# Altium PCB JacdacEc30Template10x60 102.PcbDoc
Units mm, origin at the board's own origin, x right, y up, seen from the top; angles counter-clockwise.
Board outline 18 x 55 mm, 2 copper layers (Top Layer, Bottom Layer), stack 1.525 mm thick; 8 components, 3 nets, 32 pads, 2 vias.
Unrouted connection lines stored in the file: 7.
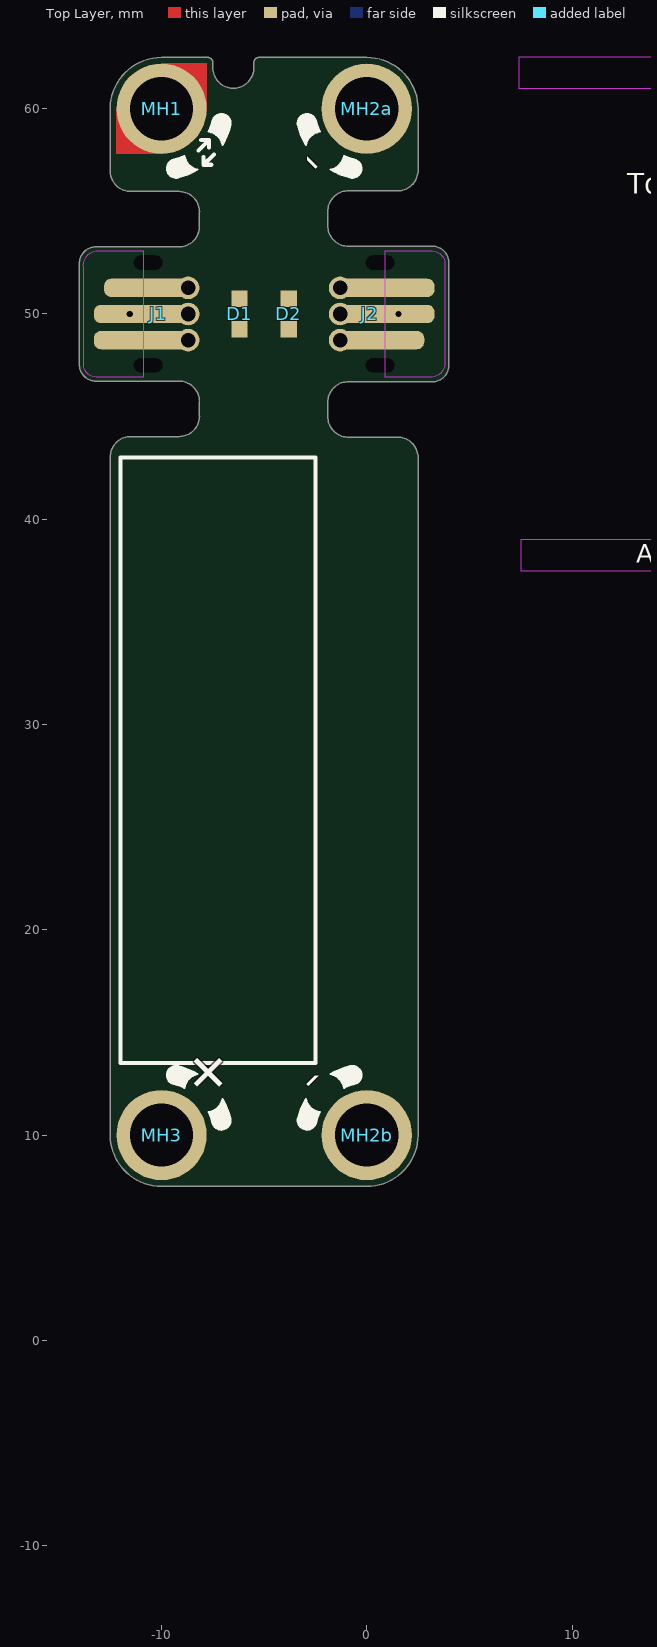
[diagram p0: Top Layer view]
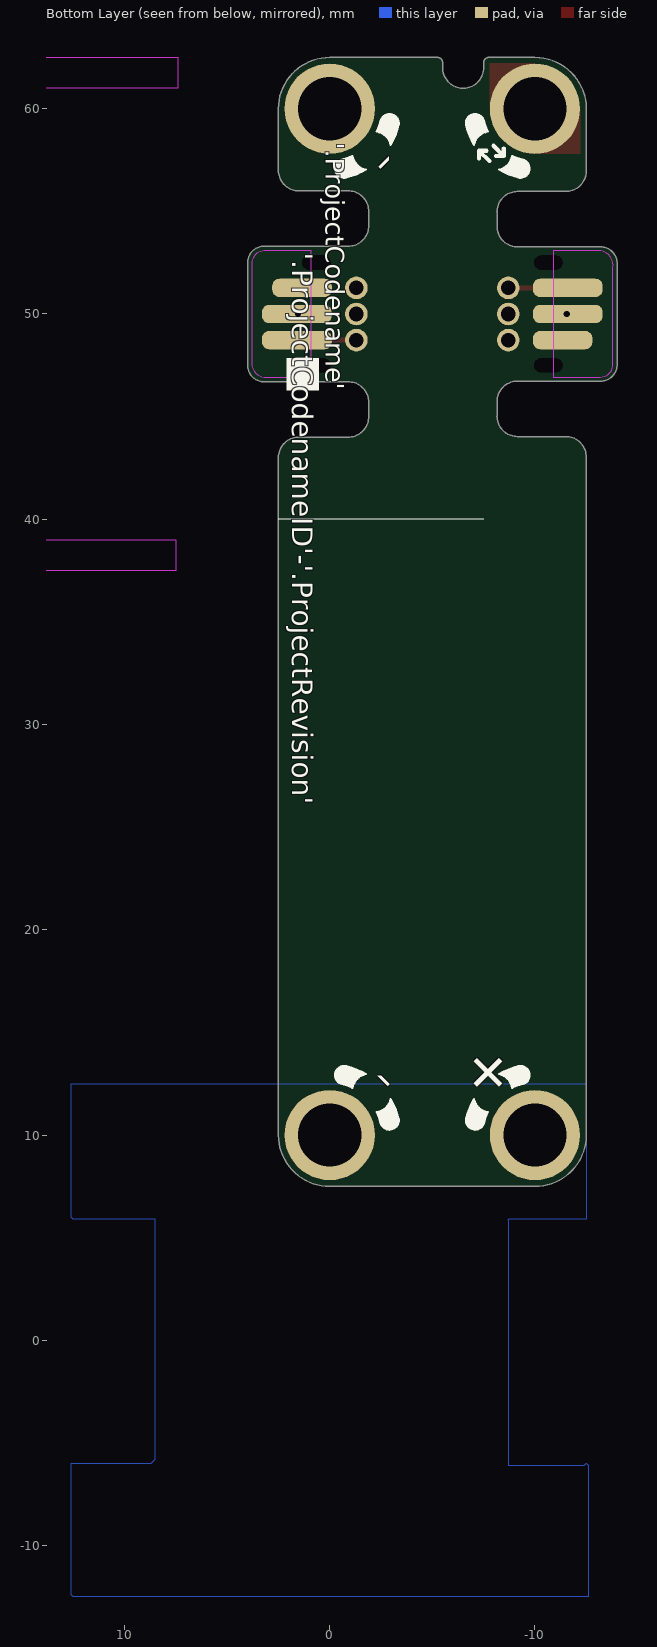
[diagram p1: Bottom Layer view, seen from below]

## Layer stack, top to bottom
Top Solder: solder mask 0.0102, Solder Resist, Dk 3.5
Top Layer: signal copper 0.0356
Dielectric 1: core 1.454, FR-4, Dk 4.2
Bottom Layer: signal copper 0.0356
Bottom Solder: solder mask 0.0102, Solder Resist, Dk 3.5

## Board outline
-12.5,10 -12.5,43.03 cw(c-11.5,43.03) -11.5,44.03 -9.148,44.03 ccw(c-9.148,45.03) -8.148,45.03 -8.15,45.03 -8.15,45.73 ccw(c-9.15,45.73) -9.15,46.73 -13.2,46.73 cw(c-13.2,47.53) -14,47.53 -14,52.47 cw(c-13.2,52.47) -13.2,53.27 -13.198,53.27 -9.148,53.27 -9.15,53.27 ccw(c-9.15,54.27) -8.15,54.27 -8.15,54.24 -8.15,54.97 -8.148,54.97 ccw(c-9.148,54.97) -9.148,55.97 -11.5,55.97 cw(c-11.5,56.97) -12.5,56.97 -12.5,60 cw(c-10,60) -10,62.5 -7.75,62.5 cw(c-7.75,62.25) -7.5,62.25 -7.5,62 ccw(c-6.5,62) -5.5,62 -5.5,62.25 cw(c-5.25,62.25) -5.25,62.5 0,62.5 cw(c0,60) 2.5,60 2.5,57 cw(c1.5,57) 1.5,56 -0.9,56 ccw(c-0.9,55) -1.9,55 -1.9,54.3 -1.902,54.3 ccw(c-0.902,54.3) -0.902,53.3 3.2,53.3 cw(c3.2,52.5) 4,52.5 4,47.5 cw(c3.2,47.5) 3.2,46.7 -0.9,46.7 ccw(c-0.9,45.7) -1.9,45.7 -1.9,45 ccw(c-0.9,45) -0.9,44 1.5,44 cw(c1.5,43) 2.5,43 2.5,10 cw(c0,10) 0,7.5 -10,7.5 cw(c-10,10)

## Design rules (kind name [scope] priority, off if disabled: settings)
AssemblyTestPointUsage [All] p1: valid=2
BoardOutlineClearance [not (HasFootprint('MOUSEBITE_CONNECTOR_3X2') or HasFootprint('MOUSEBITE_NOCONNECTOR_3'))] p1: gap=0.3 ignorepadtopadclearanceinfootprint=FALSE except(0: Arc-SplitContinuation Track-SplitContinuation SMDPad-SplitContinuation THPad-SplitContinuation Via-SplitContinuation Fill-SplitContinuation Poly-SplitContinuation Text-OutlineEdge Text-CavityEdge Text-CutoutEdge Text-SplitBarrior Text-SplitContinuation; 0.15: Region-OutlineEdge Region-CavityEdge Region-CutoutEdge Region-SplitBarrior Region-SplitContinuation)
Clearance [not (IsPad and HasFootprint('MOUSEBITE_CONNECTOR_3X2'))] p1: gap=0.15 ignorepadtopadclearanceinfootprint=FALSE except(0.254: Arc-Hole Track-Hole SMDPad-Hole THPad-Hole Via-Hole Fill-Hole Poly-Hole Region-Hole Text-Hole)
ComponentClearance [All] p1: gap=0.01 collisioncheckmode=3 verticalgap=0.2 showdistances=FALSE
DiffPairsRouting [All] p1: maxlimit=2 minlimit=0.15 mostfreqgap=0.15 toplayer_minwidth=0.15 toplayer_maxwidth=2 toplayer_prefwidth=0.15 bottomlayer_minwidth=0.15 bottomlayer_maxwidth=2 bottomlayer_prefwidth=0.15 substack1={CB9D278B-8BF5-444A-AAF4-837A2A9DF42D} toplayer_{cb9d278b-8bf5-444a-aaf4-837a2a9df42d}_minwidth=0.381 toplayer_{cb9d278b-8bf5-444a-aaf4-837a2a9df42d}_maxwidth=0.381 toplayer_{cb9d278b-8bf5-444a-aaf4-837a2a9df42d}_prefwidth=0.381 bottomlayer_{cb9d278b-8bf5-444a-aaf4-837a2a9df42d}_minwidth=0.381 bottomlayer_{cb9d278b-8bf5-444a-aaf4-837a2a9df42d}_maxwidth=0.381 bottomlayer_{cb9d278b-8bf5-444a-aaf4-837a2a9df42d}_prefwidth=0.381 substack2={826B8647-A721-4255-895A-19F9591B9CD1} toplayer_{826b8647-a721-4255-895a-19f9591b9cd1}_minwidth=0.381 toplayer_{826b8647-a721-4255-895a-19f9591b9cd1}_maxwidth=0.381 toplayer_{826b8647-a721-4255-895a-19f9591b9cd1}_prefwidth=0.381 bottomlayer_{826b8647-a721-4255-895a-19f9591b9cd1}_minwidth=0.381 bottomlayer_{826b8647-a721-4255-895a-19f9591b9cd1}_maxwidth=0.381 bottomlayer_{826b8647-a721-4255-895a-19f9591b9cd1}_prefwidth=0.381 substack3={E64FCAF4-1BC8-437D-B1E0-0E5F2DC0F59E} toplayer_{e64fcaf4-1bc8-437d-b1e0-0e5f2dc0f59e}_minwidth=0.381 toplayer_{e64fcaf4-1bc8-437d-b1e0-0e5f2dc0f59e}_maxwidth=0.381 toplayer_{e64fcaf4-1bc8-437d-b1e0-0e5f2dc0f59e}_prefwidth=0.381 bottomlayer_{e64fcaf4-1bc8-437d-b1e0-0e5f2dc0f59e}_minwidth=0.381 bottomlayer_{e64fcaf4-1bc8-437d-b1e0-0e5f2dc0f59e}_maxwidth=0.381 bottomlayer_{e64fcaf4-1bc8-437d-b1e0-0e5f2dc0f59e}_prefwidth=0.381 substack4={E61CE66C-507C-4E1E-8E83-C905434AFC1C} toplayer_{e61ce66c-507c-4e1e-8e83-c905434afc1c}_minwidth=0.381 toplayer_{e61ce66c-507c-4e1e-8e83-c905434afc1c}_maxwidth=0.381 toplayer_{e61ce66c-507c-4e1e-8e83-c905434afc1c}_prefwidth=0.381 bottomlayer_{e61ce66c-507c-4e1e-8e83-c905434afc1c}_minwidth=0.381 bottomlayer_{e61ce66c-507c-4e1e-8e83-c905434afc1c}_maxwidth=0.381 bottomlayer_{e61ce66c-507c-4e1e-8e83-c905434afc1c}_prefwidth=0.381 maxuncoupledlength=25
FabricationTestPointUsage [All] p1: valid=2 allowmultiple=FALSE
HoleSize [All] p1: absolutevalues=TRUE maxlimit=5 minlimit=0.3 maxpercent=80.000 minpercent=20.000
HoleToHoleClearance [IsPad and not (HasFootprint('MOUSEBITE_CONNECTOR_3X2') or HasFootprint('MOUSEBITE_NOCONNECTOR_3')) vs IsPad and not  (HasFootprint('MOUSEBITE_CONNECTOR_3X2') or HasFootprint('MOUSEBITE_NOCONNECTOR_3'))] p1: gap=0.5 allowstackedmicrovias=TRUE
MinimumAnnularRing [All] p1: minimumring=0.15
MinimumSolderMaskSliver [All] p1: minsoldermaskwidth=0.005
PlaneClearance [All] p1: clearance=0.3
PlaneConnect [All] p1: planeconnectstyle=Relief reliefexpansion=0.5 reliefentries=4 reliefconductorwidth=0.2 reliefairgap=0.3
PolygonConnect "PolygonConnect GND" [isVIA] p1: connectstyle=Relief reliefconductorwidth=0.2 reliefentries=4 polygonreliefangle="90 Angle" airgapwidth=0.2
PolygonConnect [All] p2: connectstyle=Relief reliefconductorwidth=0.2 reliefentries=4 polygonreliefangle="90 Angle" airgapwidth=0.2
RoutingVias [All] p1: holewidth=0.3 width=0.6 viastyle="Through Hole" minholewidth=0.3 minwidth=0.6 maxholewidth=0.3 maxwidth=0.8
SilkToSilkClearance [All] p1: silktosilkclearance=0.001
SilkToSolderMaskClearance [IsPad] p1: minsilkscreentomaskgap=0.05 clearancetoexposedcopper=TRUE
SolderMaskExpansion [All] p1: expansion=0.075 istentingtop=FALSE
UnRoutedNet [All] p1: checkbadconnections=TRUE
Width [All] p1: maxlimit=2 minlimit=0.15 preferedwidth=0.15 substack1={CB9D278B-8BF5-444A-AAF4-837A2A9DF42D} substack2={826B8647-A721-4255-895A-19F9591B9CD1} substack3={E64FCAF4-1BC8-437D-B1E0-0E5F2DC0F59E} substack4={E61CE66C-507C-4E1E-8E83-C905434AFC1C} minimp=50.000000 maximp=50.000000 favimp=50.000000
18 further rules are at their usual default settings.

## Components (designator, comment, footprint, x,y, rotation, side; value= is the part's Value field where it differs from the comment)
D1 "Everlight Elec'''" "0603 Orange" -6.2,50 r270 top
D2 "Everlight Elec'''" "0603 Orange" -3.8,50 r270 top
J1 "Jacdac edge connector" JACDAC_EDGE_CONNECTOR_NO_TRACES_V2DIMS -8.15,50 r90 top
J2 "Jacdac edge connector" JACDAC_EDGE_CONNECTOR_NO_TRACES_V2DIMS -1.85,50 r270 top
MH1 "MH_6.5MMK_4.5MMC_3.0MMD_PTH" MH_6.5MMK_4.5MMC_3.0MMD_PTH -10,60 r90 top
MH2a "MH_6.5MMK_4.5MMC_3.0MMD_PTH" MH_6.5MMK_4.5MMC_3.0MMD_PTH 0,60 r90 top
MH2b "MH_6.5MMK_4.5MMC_3.0MMD_PTH" MH_6.5MMK_4.5MMC_3.0MMD_PTH 0,10 r90 top
MH3 "MH_6.5MMK_4.5MMC_3.0MMD_PTH" MH_6.5MMK_4.5MMC_3.0MMD_PTH -10,10 r90 top

## Footprints (in the part's own frame and the unit in brackets; to place one, negate y for a bottom-side part, rotate by r counter-clockwise, add the part's x,y. Pads: shape width x height; smd on the part's side, far side on the other; paste and mask are expansions set on the pad)
"0603 Orange" [mm]
  rect 0.8x0.8 smd paste-0.05: 1(-0.75,0) 2(0.75,0)
  body extent -0.79,-0.4 0.81,0.4, height 0.4
JACDAC_EDGE_CONNECTOR_NO_TRACES_V2DIMS [mm] "Jacdac 3 pin connector with no traces and new slot definition"
  rrect78% 0.9x2.9 smd far side paste-1 mask+0: 1(-1.27,3.2)
  rrect78% 0.9x4.3 smd paste-1 mask+0: 1(1.27,2.5)
  round 1.1 hole 0.71 paste-0.254 mask+0: 1(1.27,0.55) 2(0,0.55) 3(-1.27,0.55)
  rrect78% 0.9x3.4 smd far side paste-1 mask+0: 2(0,3.45) 2(0,3.45) 3(1.27,3.45)
  rrect78% 0.9x4.8 smd paste-1 mask+0: 2(0,2.75) 3(-1.27,2.75)
  round 0 hole 0.7 slot 1.4 at 90 deg unplated: ""(-2.5,2.5) ""(2.5,2.5)
  Top Layer keep-out region: -3.075,2.75 -3.07,5.033 -2.987,5.341 -2.761,5.567 -2.453,5.65 -2.453,5.65 2.27,5.65 2.545,5.635 2.794,5.516 2.978,5.31 3.07,5.05 3.07,5.05 3.07,2.75
  Bottom Layer lines w0.2: -1.27,0.85 -1.126,0.85
  Bottom Layer keep-out region: -3.07,2.75 -3.07,5.033 -3.023,5.269 -2.889,5.469 -2.689,5.603 -2.453,5.65 -2.453,5.65 2.27,5.65 2.546,5.635 2.794,5.516 2.978,5.31 3.07,5.05 3.07,5.05 3.07,2.75
MH_6.5MMK_4.5MMC_3.0MMD_PTH [mm] "Jacdac mounting hole 6.5mm clearance, 4.5 annualar ring and 3.0mm PTH"
  round 4.4 hole 3.08 mask+0.3: 1(0,0)

## Part data
D1 D2: library part 19-217/S2C-AQ1R1B/3T, "LED ORANGE DIFFUSED 0603 SMD", Case Code (Imperial)=0603, Color=Orange, Manufacturer="Everlight Elec", Supplier 1 Part Number=C146215, Case/Package=0603, Colour=Orange, ComponentLink1Description="Online datasheet", ComponentLink1URL=https://datasheet.lcsc.com/lcsc/1912171731_Everlight-Elec-19-217-S2C-AQ1R1B-3T_C146215.pdf, Manufacturer Part Number=19-217/S2C-AQ1R1B/3T, Mount="Surface Mount", Supplier 1=LCSC
J1 J2: "3 pin Jacdac edge connector 1.27mm pitch", Manufacturer Part Number=JACDAC_EDGE_CONNECTOR, Checked By=?, ComponentLink1Description="Yuliang JACDAC cable connector drawing online", ComponentLink1URL=https://github.com/microsoft/jacdac-mdk/blob/main/connector/JACDAC-Connector-by-Yuliang-2020-11-28.pdf, ComponentLink2Description="JACDAC PCB edge connector spec onlin", ComponentLink2URL=https://github.com/microsoft/jacdac-mdk/blob/main/connector/JACDAC_PCB_Edge_Connector_Drawing_JD-PEC-01_rev_01.pdf, Created By="D. Gakure", PCB Type="1.6mm FR4"
MH1 MH2a MH2b MH3: "Mounting Hole 6.5mm keepout, 4.5mm annualar ring and 3.0mm Drill PTH"

## Via types
v1: diameter 0.6, hole 0.3, Top Layer to Bottom Layer, tented both sides, 2 vias

## Nets (pads, with @x,y where several pads share a name; then routed paths per layer and width w, separated by ;. In a path a pad name is that pad's centre, name@x,y a point inside that pad or via, vN(x,y) a via of type N, cw(c..) or ccw(c..) an arc to the next point about the centre after c; other vN are vias at no path point)
GND: 
JD_DATA: 
JD_PWR: 
pads on no net: D1.1 D1.2 D2.1 D2.2 J1. J1.1 J1.2 J1.3 J2. J2.1 J2.2 J2.3 MH1.1 MH2a.1 MH2b.1 MH3.1
copper on no net: | length 3.7
  Top Layer w0.25: -10.65,51.27 -8.7,51.27 ; -1.05,48.73 0.65,48.73
  other v1: -11.55,50 1.55,50

## Polygon pours and split planes (outlines as drawn)
no net on Bottom Assy "NONET_L-01_P-001" (hatched 45Degree grid 0.15 track 0.01, shelved): 12.5,-8.342 ccw(c10,-10) 8.342,-12.5 10,-12.5 ccw(c10,-10) 12.5,-10
no net on Bottom Assy "NONET_L-01_P-001" (hatched 45Degree grid 0.15 track 0.01, shelved): -12.5,-8.342 cw(c-10,-10) -8.342,-12.5 -10,-12.5 cw(c-10,-10) -12.5,-10
no net on Bottom Assy "NONET_L-01_P-001" (hatched 45Degree grid 0.15 track 0.01, shelved): -9.3,-2.868 -13.2,-2.868 cw(c-13.2,-2.468) -13.6,-2.468 -13.6,-2.466 -13.6,2.477 -13.6,2.474 cw(c-13.2,2.474) -13.2,2.874 -13.198,2.874 -9.3,2.874
no net on Bottom Assy "NONET_L-01_P-001" (hatched 45Degree grid 0.15 track 0.01, shelved): -12.5,8.342 ccw(c-10,10) -8.342,12.5 -10,12.5 ccw(c-10,10) -12.5,10
no net on Bottom Assy "NONET_L-01_P-001" (hatched 45Degree grid 0.15 track 0.01, shelved): 12.5,8.342 cw(c10,10) 8.342,12.5 10,12.5 cw(c10,10) 12.5,10
no net on Bottom Assy "NONET_L-01_P-001" (hatched 45Degree grid 0.15 track 0.01, shelved): 9.3,-2.88 13.2,-2.88 ccw(c13.2,-2.48) 13.6,-2.48 13.6,-2.478 13.6,2.465 13.6,2.462 ccw(c13.2,2.462) 13.2,2.862 13.198,2.862 9.3,2.862
no net on Bottom Assy "NONET_L-01_P-001" (solid, shelved): 10,7.8 ccw(c10,10) 12.2,10 ccw(c10,10) 10,12.2 ccw(c10,10) 7.8,10 ccw(c10,10)
no net on Bottom Assy "NONET_L-01_P-001" (solid, shelved): -10,7.8 ccw(c-10,10) -7.8,10 ccw(c-10,10) -10,12.2 ccw(c-10,10) -12.2,10 ccw(c-10,10)
no net on Bottom Assy "NONET_L-01_P-001" (solid, shelved): 10,-12.2 ccw(c10,-10) 12.2,-10 ccw(c10,-10) 10,-7.8 ccw(c10,-10) 7.8,-10 ccw(c10,-10)
no net on Bottom Assy "NONET_L-01_P-001" (solid, shelved): -12.449,1.72 ccw(c-12.449,1.369) -12.8,1.369 -12.8,1.171 ccw(c-12.449,1.171) -12.449,0.82 -9.016,0.82 ccw(c-8.7,1.27) -9.016,1.72
no net on Bottom Assy "NONET_L-01_P-001" (solid, shelved): -12.949,0.45 ccw(c-12.949,0.099) -13.3,0.099 -13.3,-0.099 ccw(c-12.949,-0.099) -12.949,-0.45 -9.016,-0.45 ccw(c-8.7,0) -9.016,0.45
no net on Bottom Assy "NONET_L-01_P-001" (solid, shelved): -12.949,-0.82 ccw(c-12.949,-1.171) -13.3,-1.171 -13.3,-1.369 ccw(c-12.949,-1.369) -12.949,-1.72 -9.016,-1.72 ccw(c-8.7,-1.27) -9.016,-0.82
no net on Bottom Assy "NONET_L-01_P-001" (solid, shelved): -10,-12.2 ccw(c-10,-10) -7.8,-10 ccw(c-10,-10) -10,-7.8 ccw(c-10,-10) -12.2,-10 ccw(c-10,-10)
no net on Bottom Assy "NONET_L-01_P-001" (solid, shelved): -9.9,7.8 -7.8,9.9 -7.8,12.215 -9.985,12.215 -12.215,9.985 -12.215,7.8
no net on Bottom Assy "NONET_L-01_P-001" (hatched 45Degree grid 0.3 track 0.01, shelved): 10,-12.5 ccw(c10,-10) 12.5,-10 12.5,-6.974 ccw(c11.5,-6.974) 11.5,-5.974 9.148,-5.974 9.15,-5.975 cw(c9.15,-4.975) 8.15,-4.975 8.15,-4.974 8.15,-4.274 cw(c9.15,-4.274) 9.15,-3.274 9.148,-3.274 13.198,-3.274 13.2,-3.274 ccw(c13.2,-2.474) 14,-2.474 14,2.466 ccw(c13.2,2.466) 13.2,3.266 9.15,3.266 cw(c9.15,4.266) 8.15,4.266 8.15,4.966 cw(c9.15,4.966) 9.15,5.966 11.5,5.966 ccw(c11.5,6.966) 12.5,6.966 12.5,10 ccw(c10,10) 10,12.5 -5.225,12.5 -5.25,12.5 ccw(c-5.25,12.25) -5.5,12.25 -5.5,12 cw(c-6.5,12) -6.5,11 6.646,11 ccw(c10,10) 7,8.197 7,-8.197 ccw(c10,-10) 6.646,-11 -6.646,-11 ccw(c-10,-10) -7,-8.197 -7,8.197 ccw(c-10,10) -6.65,11.015 -6.656,11.012 cw(c-6.5,12) -7.5,12 -7.5,12.25 ccw(c-7.75,12.25) -7.75,12.5 -7.729,12.5 -10,12.5 ccw(c-10,10) -12.5,10 -12.5,6.974 ccw(c-11.5,6.974) -11.5,5.974 -9.148,5.974 cw(c-9.148,4.974) -8.148,4.974 -8.15,4.274 cw(c-9.15,4.274) -9.15,3.274 -9.148,3.274 -13.198,3.274 -13.2,3.274 ccw(c-13.2,2.474) -14,2.474 -14,-2.47 -14,-2.474 ccw(c-13.2,-2.474) -13.2,-3.274 -13.198,-3.274 -9.148,-3.274 -9.15,-3.274 cw(c-9.15,-4.274) -8.15,-4.274 -8.148,-4.97 -8.148,-4.974 cw(c-9.148,-4.974) -9.148,-5.974 -11.5,-5.974 ccw(c-11.5,-6.974) -12.5,-6.974 -12.5,-10 ccw(c-10,-10) -10,-12.5 -7.729,-12.5
no net on Bottom Assy "NONET_L-01_P-001" (solid, shelved): 10,-12.2 ccw(c10,-10) 12.2,-10 ccw(c10,-10) 10,-7.8 ccw(c10,-10) 7.8,-10 ccw(c10,-10)
no net on Bottom Assy "NONET_L-01_P-001" (solid, shelved): -10,-12.2 ccw(c-10,-10) -7.8,-10 ccw(c-10,-10) -10,-7.8 ccw(c-10,-10) -12.2,-10 ccw(c-10,-10)
no net on Bottom Assy "NONET_L-01_P-001" (solid, shelved): -10,7.8 ccw(c-10,10) -7.8,10 ccw(c-10,10) -10,12.2 ccw(c-10,10) -12.2,10 ccw(c-10,10)
no net on Bottom Assy "NONET_L-01_P-001" (solid, shelved): 10,7.8 ccw(c10,10) 12.2,10 ccw(c10,10) 10,12.2 ccw(c10,10) 7.8,10 ccw(c10,10)
no net on Bottom Layer "NONET_L02_P000" (solid, shelved, pour order 0): -12.5,12.5 -12.5,5.9 -8.724,5.9 -8.675,5.851 -8.7,5.826 -8.7,-6.1 -12.4,-6.1 -12.5,-6 -12.6,-6.1 -12.6,-12.5 12.5,-12.5 12.6,-12.4 12.6,-6 8.7,-6 8.5,-5.8 8.5,5.9 12.5,5.9 12.6,6 12.6,12.5

## Keep-outs
Keep-Out Layer:
  region: 32.5,37.5 32.5,39 7.5,39 7.5,37.5
  region: 32.4,61 32.4,62.5 7.4,62.5 7.4,61

## Other copper
Top Layer:
  region: -12.215,57.8 -9.9,57.8 -7.8,59.9 -7.8,62.215 -9.985,62.215 -12.215,59.985
  text "Top Layer" at 14.701,61.75 h1.7
Bottom Layer:
  pour cut-out: 0,7.5 ccw(c0,10) 2.5,10 ccw(c0,10) 0,12.5 ccw(c0,10) -2.5,10 ccw(c0,10)
  pour cut-out: 0,57.5 ccw(c0,60) 2.5,60 ccw(c0,60) 0,62.5 ccw(c0,60) -2.5,60 ccw(c0,60)
  pour cut-out: -10,57.5 ccw(c-10,60) -7.5,60 ccw(c-10,60) -10,62.5 ccw(c-10,60) -12.5,60 ccw(c-10,60)
  pour cut-out: -10,7.5 ccw(c-10,10) -7.5,10 ccw(c-10,10) -10,12.5 ccw(c-10,10) -12.5,10 ccw(c-10,10)
  text "Bottom Layer" at 14.7,60.25 h1.7

## Silkscreen, mask and mechanical layers (free items; w line width, h text height)
Top Overlay:
  region: -7.032,11.758 cw(c-7.817,11.911) -7.708,11.118 -7.697,11.094 cw(c-10,10) -7.52,10.591 ccw(c-7.085,10.707) -6.65,10.824 -6.645,10.802 ccw(c-10,10)
  region: -2.968,11.758 ccw(c-2.183,11.911) -2.291,11.118 -2.303,11.094 ccw(c0,10) -2.48,10.591 cw(c-2.915,10.707) -3.35,10.824 -3.355,10.802 cw(c0,10)
  region: -1.758,12.968 cw(c-1.911,12.183) -1.118,12.291 -1.094,12.303 cw(c0.001,10) -0.591,12.48 ccw(c-0.707,12.915) -0.824,13.35 -0.802,13.355 ccw(c0.001,10)
  region: -1.758,57.032 ccw(c-1.911,57.817) -1.118,57.709 -1.094,57.697 ccw(c0,60) -0.591,57.52 cw(c-0.707,57.085) -0.824,56.65 -0.802,56.645 cw(c0,60)
  region: -8.242,12.968 ccw(c-8.089,12.183) -8.881,12.291 -8.905,12.303 ccw(c-10,10) -9.409,12.48 cw(c-9.292,12.915) -9.176,13.35 -9.197,13.355 cw(c-10,10)
  region: -2.968,58.242 cw(c-2.183,58.089) -2.291,58.882 -2.303,58.906 cw(c0,60) -2.48,59.409 ccw(c-2.915,59.293) -3.35,59.176 -3.355,59.198 ccw(c0,60)
  region: -7.032,58.242 ccw(c-7.817,58.089) -7.708,58.882 -7.697,58.906 ccw(c-10,60) -7.52,59.409 cw(c-7.085,59.293) -6.65,59.176 -6.645,59.198 cw(c-10,60)
  region: -8.242,57.032 cw(c-8.089,57.817) -8.881,57.709 -8.905,57.697 cw(c-10,60) -9.409,57.52 ccw(c-9.292,57.085) -9.176,56.65 -9.197,56.645 ccw(c-10,60)
  lines w0.1: -9.197,13.355 cw(c-10,10) -8.242,12.968 ; -9.197,56.645 ccw(c-10,60) -8.242,57.032 cw(c-8.089,57.817) -8.881,57.708 ; -9.176,13.35 ccw(c-9.292,12.915) -9.409,12.48 cw(c-10,10) -8.905,12.303 ; -9.176,56.65 cw(c-9.292,57.085) -9.409,57.52 ccw(c-10,60) -8.905,57.697 ; -8.881,12.292 cw(c-8.089,12.183) -8.242,12.968 ; -7.708,11.118 ccw(c-7.817,11.911) -7.032,11.758 cw(c-10,10) -6.645,10.803 ; -7.708,58.882 cw(c-7.817,58.089) -7.032,58.242 ccw(c-10,60) -6.645,59.197 ; -7.697,11.095 cw(c-10,10) -7.52,10.591 ccw(c-7.085,10.708) -6.65,10.824 ; -7.697,58.905 ccw(c-10,60) -7.52,59.409 cw(c-7.085,59.292) -6.65,59.176 ; -3.355,10.803 cw(c0,10) -2.968,11.758 ccw(c-2.183,11.911) -2.292,11.118 ; -3.355,59.197 ccw(c0,60) -2.968,58.242 cw(c-2.183,58.089) -2.292,58.882 ; -3.35,10.824 ccw(c-2.915,10.708) -2.48,10.592 cw(c0,10) -2.303,11.095 ; -3.35,59.176 cw(c-2.915,59.292) -2.48,59.408 ccw(c0,60) -2.303,58.905 ; -1.758,12.968 cw(c0,10) -0.803,13.355 ; -1.758,12.968 cw(c-1.911,12.183) -1.118,12.292 ; -1.118,57.708 cw(c-1.911,57.817) -1.758,57.032 ccw(c0,60) -0.803,56.645 ; -1.095,12.303 cw(c0,10) -0.591,12.48 ccw(c-0.708,12.915) -0.824,13.35 ; -1.095,57.697 ccw(c0,60) -0.591,57.52 cw(c-0.708,57.085) -0.824,56.65
  lines w0.2: -8.196,57.973 -7.693,58.476 ; -8.064,58.476 -7.693,58.476 ; -7.951,57.643 -7.951,57.272 ; -7.693,58.105 -7.693,58.476 ; -7.58,57.272 -7.951,57.272 ; -7.448,57.775 -7.951,57.272 ; -12,13.5 -2.5,13.5 -2.5,43 -12,43 -12,13.5
  text "Module name" at 14.019,61.27 h0.9
  text "-" at -1.048,58.255 h4.5 r135
  text "Top Overlay" at 12.701,55.525 h1.7
  text "Additional module info" at 13.123,37.87 h0.9
  text "+" at -7.993,11.112 h3.5 r315
  text "-" at -1.745,11.048 h4.5 r45
Bottom Overlay:
  region: 2.108,46.27 2.108,47.846 0.516,47.846 0.516,46.27
  region: -7.032,11.758 cw(c-7.817,11.911) -7.708,11.118 -7.697,11.094 cw(c-10,10) -7.52,10.591 ccw(c-7.085,10.707) -6.65,10.824 -6.645,10.802 ccw(c-10,10)
  region: -2.968,11.758 ccw(c-2.183,11.911) -2.291,11.118 -2.303,11.094 ccw(c0,10) -2.48,10.591 cw(c-2.915,10.707) -3.35,10.824 -3.355,10.802 cw(c0,10)
  region: -1.758,12.968 cw(c-1.911,12.183) -1.118,12.291 -1.094,12.303 cw(c0.001,10) -0.591,12.48 ccw(c-0.707,12.915) -0.824,13.35 -0.802,13.355 ccw(c0.001,10)
  region: -1.758,57.032 ccw(c-1.911,57.817) -1.118,57.709 -1.094,57.697 ccw(c0,60) -0.591,57.52 cw(c-0.707,57.085) -0.824,56.65 -0.802,56.645 cw(c0,60)
  region: -8.242,12.968 ccw(c-8.089,12.183) -8.881,12.291 -8.905,12.303 ccw(c-10,10) -9.409,12.48 cw(c-9.292,12.915) -9.176,13.35 -9.197,13.355 cw(c-10,10)
  region: -2.968,58.242 cw(c-2.183,58.089) -2.291,58.882 -2.303,58.906 cw(c0,60) -2.48,59.409 ccw(c-2.915,59.293) -3.35,59.176 -3.355,59.198 ccw(c0,60)
  region: -7.032,58.242 ccw(c-7.817,58.089) -7.708,58.882 -7.697,58.906 ccw(c-10,60) -7.52,59.409 cw(c-7.085,59.293) -6.65,59.176 -6.645,59.198 cw(c-10,60)
  region: -8.242,57.032 cw(c-8.089,57.817) -8.881,57.709 -8.905,57.697 cw(c-10,60) -9.409,57.52 ccw(c-9.292,57.085) -9.176,56.65 -9.197,56.645 ccw(c-10,60)
  lines w0.01: -7.5,40 2.5,40
  lines w0.1: -9.197,13.355 cw(c-10,10) -8.242,12.968 ; -9.197,56.645 ccw(c-10,60) -8.242,57.032 cw(c-8.089,57.817) -8.881,57.708 ; -9.176,13.35 ccw(c-9.292,12.915) -9.409,12.48 cw(c-10,10) -8.905,12.303 ; -9.176,56.65 cw(c-9.292,57.085) -9.409,57.52 ccw(c-10,60) -8.905,57.697 ; -8.881,12.292 cw(c-8.089,12.183) -8.242,12.968 ; -7.708,11.118 ccw(c-7.817,11.911) -7.032,11.758 cw(c-10,10) -6.645,10.803 ; -7.708,58.882 cw(c-7.817,58.089) -7.032,58.242 ccw(c-10,60) -6.645,59.197 ; -7.697,11.095 cw(c-10,10) -7.52,10.591 ccw(c-7.085,10.708) -6.65,10.824 ; -7.697,58.905 ccw(c-10,60) -7.52,59.409 cw(c-7.085,59.292) -6.65,59.176 ; -3.355,10.803 cw(c0,10) -2.968,11.758 ccw(c-2.183,11.911) -2.292,11.118 ; -3.355,59.197 ccw(c0,60) -2.968,58.242 cw(c-2.183,58.089) -2.292,58.882 ; -3.35,10.824 ccw(c-2.915,10.708) -2.48,10.592 cw(c0,10) -2.303,11.095 ; -3.35,59.176 cw(c-2.915,59.292) -2.48,59.408 ccw(c0,60) -2.303,58.905 ; -1.758,12.968 cw(c0,10) -0.803,13.355 ; -1.758,12.968 cw(c-1.911,12.183) -1.118,12.292 ; -1.118,57.708 cw(c-1.911,57.817) -1.758,57.032 ccw(c0,60) -0.803,56.645 ; -1.095,12.303 cw(c0,10) -0.591,12.48 ccw(c-0.708,12.915) -0.824,13.35 ; -1.095,57.697 ccw(c0,60) -0.591,57.52 cw(c-0.708,57.085) -0.824,56.65
  lines w0.2: -8.476,58.064 -8.476,57.693 ; -8.105,57.693 -8.476,57.693 ; -7.973,58.196 -8.476,57.693 ; -7.775,57.448 -7.272,57.951 ; -7.643,57.951 -7.272,57.951 ; -7.272,57.58 -7.272,57.951
  text "Bottom Overlay" at 23.3,61.725 h1.7
  text "'.ProjectCodename'" at 0.2,58.342 h0.9 r90
  text "-" at -1.048,58.255 h4.5 r135
  text "'.ProjectCodenameID'-'.ProjectRevision'" at 1.818,52.98 h1 r90
  text "+" at -7.993,11.112 h3.5 r315
  text "-" at -1.745,11.048 h4.5 r45
Top Paste:
  text "Top Paste" at 23.301,60.318 h1.7
Bottom Paste:
  text "Bottom Paste" at 23.3,58.84 h1.7
Top Solder:
  text "Top Solder (resist)" at 23.301,57.518 h1.7
Bottom Solder:
  text "Bottom Solder (resist)" at 23.3,56.027 h1.7
Drill Guide:
  text "Drill Guide" at 36.725,57.515 h1.7
Dimension:
  circle w0.1: c0,10 r2.2
  circle w0.1: c-10,10 r3.5
  text "Dimension" at 36.725,58.815 h1.7
Fabrication notes:
  lines w0.1: -14.7,49.8 -12.4,47.5 -11.9,47.5 -10.65,47.5 ; -14.7,50.2 -12.4,52.5 -11.9,52.5 -10.65,52.5 ; -10.629,69.55 -10.979,69.9 ; -10.629,70.25 -10.979,69.9 ; -8,69.9 -10.979,69.9 ; -7.991,69.9 -7.987,36.575 ; 7.987,36.575 7.991,69.9 ; 8,69.9 10.979,69.9 ; 10.629,69.55 10.979,69.9 ; 10.629,70.25 10.979,69.9 ; 10.65,47.5 11.9,47.5 12.4,47.5 14.7,49.8 ; 10.65,52.5 11.9,52.5 12.4,52.5 14.7,50.2
  text "no board edge pips/ / rat's teeth/mouse bites  / left of this line - make  / sure board edge is clean" at -24.497,63.9 h1.7
  text "no board edge pips/ / rat's teeth/mouse bites  / right of this line - make  / sure board edge is clean" at 8.7,63.7 h1.7
  text "Fabrication Notes" at 36.725,61.715 h1.7
  text "non-plated slots x2" at 15.001,49.693 h1.7
  text "non-plated slots x2" at -25.599,49.593 h1.7
Top Component Center:
  lines w0.2: -6.7,50 -5.7,50 ; -6.2,49.5 -6.2,50.5 ; -4.3,50 -3.3,50 ; -3.8,49.5 -3.8,50.5
Alignment:
  circle w0.1: c0,60 r2.5
Mechanical 9:
  lines w0.01: 25.77,41.405 ccw(c23.445,41.45) 25.77,41.45 ; 25.77,46.6 ccw(c23.445,46.6) 25.77,46.645
Board Outline:
  lines w0.2: -13.2,53.27 ccw(c-13.2,52.47) -14,52.47 -14,47.53 ccw(c-13.2,47.53) -13.2,46.73 -9.15,46.73 cw(c-9.15,45.73) -8.15,45.73 -8.15,45.03 ; -13.198,53.27 -9.148,53.27 ; -9.15,53.27 ccw(c-9.15,54.27) -8.15,54.27 ; -8.15,54.24 -8.15,54.97 ; -8.148,45.03 cw(c-9.148,45.03) -9.148,44.03 -11.5,44.03 ccw(c-11.5,43.03) -12.5,43.03 -12.5,10 ccw(c-10,10) -10,7.5 0,7.5 ccw(c0,10) 2.5,10 2.5,43 ccw(c1.5,43) 1.5,44 -0.9,44 cw(c-0.9,45) -1.9,45 -1.9,45.7 ; -8.148,54.97 ccw(c-9.148,54.97) -9.148,55.97 -11.5,55.97 cw(c-11.5,56.97) -12.5,56.97 -12.5,60 cw(c-10,60) -10,62.5 -7.75,62.5 cw(c-7.75,62.25) -7.5,62.25 -7.5,62 ccw(c-6.5,62) -5.5,62 -5.5,62.25 cw(c-5.25,62.25) -5.25,62.5 0,62.5 cw(c0,60) 2.5,60 2.5,57 cw(c1.5,57) 1.5,56 -0.9,56 ccw(c-0.9,55) -1.9,55 -1.9,54.3 ; -1.902,54.3 ccw(c-0.902,54.3) -0.902,53.3 ; -1.9,45.7 cw(c-0.9,45.7) -0.9,46.7 3.2,46.7 ; -0.9,53.3 3.2,53.3 cw(c3.2,52.5) 4,52.5 4,47.5 cw(c3.2,47.5) 3.2,46.7
  text "Board Outline" at 36.725,60.315 h1.7
Top Assy:
  text "Top Assy" at 14.701,58.925 h1.7
Bottom Assy:
  text "Bottom Assy" at 14.7,57.525 h1.7
Drill Drawing:
  text "Drill Drawing" at 36.725,56.01 h1.7
Assembly Notes:
  lines w0.05: -12.504,42.969 -7.15,42.969 -7.15,57.031 -12.504,57.031 -12.504,42.969
Top Dwg:
  circle w0.025: c0,10 r2.5
  circle w0.025: c0,60 r1.515
  circle w0.025: c0,60 r2.2
  circle w0.025: c0,60 r2.5
  circle w0.025: c-10,10 r2.5
  pour cut-out: 0,8.485 ccw(c0,10) 1.515,10 ccw(c0,10) 0,11.515 ccw(c0,10) -1.515,10 ccw(c0,10)
  pour cut-out: 0,58.485 ccw(c0,60) 1.515,60 ccw(c0,60) 0,61.515 ccw(c0,60) -1.515,60 ccw(c0,60)
  pour cut-out: -10,58.485 ccw(c-10,60) -8.485,60 ccw(c-10,60) -10,61.515 ccw(c-10,60) -11.515,60 ccw(c-10,60)
  pour cut-out: -10,8.485 ccw(c-10,10) -8.485,10 ccw(c-10,10) -10,11.515 ccw(c-10,10) -11.515,10 ccw(c-10,10)
  lines w0.01: -14,47.526 ccw(c-13.2,47.526) -13.2,46.726 ; -14,47.53 -14,52.474 cw(c-13.2,52.474) -13.2,53.274 ; -13.198,46.726 -9.148,46.726 ; -13.198,53.274 -9.148,53.274 ; -12.5,41.658 -12.5,43.026 cw(c-11.5,43.026) -11.5,44.026 ; -12.5,56.974 -12.5,57.5 ; -12.5,56.974 ccw(c-11.5,56.974) -11.5,55.974 -9.148,55.974 cw(c-9.148,54.974) -8.148,54.974 -8.15,54.274 ; -11.5,44.026 -9.148,44.026 ; -9.15,46.726 cw(c-9.15,45.726) -8.15,45.726 -8.148,45.03 ; -9.15,53.274 ccw(c-9.15,54.274) -8.15,54.274 ; -9.148,44.026 ccw(c-9.148,45.026) -8.148,45.026 ; -1.9,45 ccw(c-0.9,45) -0.9,44 1.5,44 cw(c1.5,43) 2.5,43 2.5,41.658 ; -1.9,45.026 -1.9,45.726 ; -1.9,45.7 cw(c-0.9,45.7) -0.9,46.7 ; -1.9,55 cw(c-0.9,55) -0.9,56 1.5,56 ccw(c1.5,57) 2.5,57 2.5,58.375 ; 3.2,46.7 ccw(c3.2,47.5) 4,47.5 ; 3.2,53.3 cw(c3.2,52.5) 4,52.5
  lines w0.025: -12.5,41.658 -12.5,40 ccw(c-10,40) -10,37.5 -8.342,37.5 ; -8.342,37.5 -7.729,37.5 8.342,37.5 ; -6.656,61.012 cw(c-6.5,62) -7.5,62 ; -6.5,61 ccw(c-6.5,62) -5.5,62 -5.5,62.25 cw(c-5.25,62.25) -5.25,62.5 0,62.5 cw(c0,60) 2.5,60 2.5,58.342 ; 0,7.5 ccw(c0,10) 2.5,10 ; 2.5,40 2.5,41.658 ; -7.5,62 -7.5,62.25 ccw(c-7.75,62.25) -7.75,62.5 -10,62.5 ccw(c-10,60) -12.5,60 -12.5,57.5 -10,57.5 ccw(c-10,60) -7.5,60 -7.5,62
Component Keepout Dwg:
  lines w0.025: -14,47.526 ccw(c-13.2,47.526) -13.2,46.726 ; -14,47.53 -14,52.474 cw(c-13.2,52.474) -13.2,53.274 ; -13.198,46.726 -9.148,46.726 ; -13.198,53.274 -9.148,53.274 ; -12.5,56.974 -12.5,60 cw(c-10,60) -10,62.5 -7.729,62.5 ; -12.5,56.974 ccw(c-11.5,56.974) -11.5,55.974 -9.148,55.974 cw(c-9.148,54.974) -8.148,54.974 -8.15,54.274 ; -11.5,44.026 ccw(c-11.5,43.026) -12.5,43.026 -12.5,40 ccw(c-10,40) -10,37.5 -7.729,37.5 10,37.5 ccw(c10,40) 12.5,40 12.5,43.026 ccw(c11.5,43.026) 11.5,44.026 ; -11.5,44.026 -9.148,44.026 ; -9.15,46.726 cw(c-9.15,45.726) -8.15,45.726 -8.148,45.03 ; -9.15,53.274 ccw(c-9.15,54.274) -8.15,54.274 ; -9.148,44.026 ccw(c-9.148,45.026) -8.148,45.026 ; -7.75,62.5 cw(c-7.75,62.25) -7.5,62.25 -7.5,62 ccw(c-6.5,62) -6.656,61.012 ; -6.65,61.015 cw(c-10,60) -7,58.197 -7,41.803 cw(c-10,40) -6.646,39 6.646,39 cw(c10,40) 7,41.803 7,58.197 cw(c10,60) 6.646,61 -6.5,61 ccw(c-6.5,62) -5.5,62 -5.5,62.25 cw(c-5.25,62.25) -5.25,62.5 10,62.5 cw(c10,60) 12.5,60 12.5,56.966 ; 8.15,45.025 ccw(c9.15,45.025) 9.15,44.025 ; 8.15,45.026 8.15,45.726 cw(c9.15,45.726) 9.15,46.726 ; 8.15,54.266 ccw(c9.15,54.266) 9.15,53.266 13.2,53.266 cw(c13.2,52.466) 14,52.466 14,47.526 ; 8.15,54.266 8.15,54.966 cw(c9.15,54.966) 9.15,55.966 ; 9.148,44.026 11.5,44.026 ; 9.148,46.726 13.198,46.726 ; 9.148,55.966 11.5,55.966 ccw(c11.5,56.966) 12.5,56.966 ; 13.2,46.726 ccw(c13.2,47.526) 14,47.526
Routing Keepout Dwg:
  lines w0.01: -14,47.526 ccw(c-13.2,47.526) -13.2,46.726 ; -14,47.53 -14,52.474 cw(c-13.2,52.474) -13.2,53.274 ; -13.6,47.532 ccw(c-13.2,47.532) -13.2,47.132 -9.25,47.132 ; -13.6,47.534 -13.6,52.477 ; -13.6,52.474 cw(c-13.2,52.474) -13.2,52.874 ; -13.198,46.726 -9.148,46.726 ; -13.198,52.874 -9.25,52.874 ; -13.198,53.274 -9.148,53.274 ; -12.5,41.658 -12.5,43.026 cw(c-11.5,43.026) -11.5,44.026 ; -12.5,56.974 -12.5,58.342 ; -12.5,56.974 ccw(c-11.5,56.974) -11.5,55.974 -9.148,55.974 cw(c-9.148,54.974) -8.148,54.974 -8.15,54.274 ; -11.5,44.026 -9.148,44.026 ; -9.3,47.132 -9.3,52.874 ; -9.15,46.726 cw(c-9.15,45.726) -8.15,45.726 -8.148,45.03 ; -9.15,53.274 ccw(c-9.15,54.274) -8.15,54.274 ; -9.148,44.026 ccw(c-9.148,45.026) -8.148,45.026 ; 8.15,45.025 ccw(c9.15,45.025) 9.15,44.025 ; 8.15,45.026 8.15,45.726 cw(c9.15,45.726) 9.15,46.726 ; 8.15,54.266 ccw(c9.15,54.266) 9.15,53.266 13.2,53.266 cw(c13.2,52.466) 14,52.466 14,47.526 ; 8.15,54.266 8.15,54.966 cw(c9.15,54.966) 9.15,55.966 ; 9.148,44.026 11.5,44.026 ; 9.148,46.726 13.198,46.726 ; 9.148,55.966 11.5,55.966 ccw(c11.5,56.966) 12.5,56.966 ; 11.5,44.026 cw(c11.5,43.026) 12.5,43.026 12.5,41.658 ; 12.5,56.966 12.5,58.342 ; 13.2,46.726 ccw(c13.2,47.526) 14,47.526
  lines w0.025: -12.5,41.658 -12.5,40 ccw(c-10,40) -10,37.5 -8.342,37.5 -7.729,37.5 8.342,37.5 10,37.5 ccw(c10,40) 12.5,40 12.5,41.658 ; -8.342,62.5 cw(c-10,60) -7.172,61 ; -7.75,62.5 cw(c-7.75,62.25) -7.5,62.25 -7.5,62 ccw(c-6.5,62) -6.656,61.012 ; -7.729,62.5 -8.342,62.5 ; -6.5,61 ccw(c-6.5,62) -5.5,62 -5.5,62.25 cw(c-5.25,62.25) -5.25,62.5 8.342,62.5 10,62.5 cw(c10,60) 12.5,60 12.5,58.342 ; -8.342,62.5 cw(c-10,60) -12.5,58.342 -12.5,60 cw(c-10,60) -10,62.5 -8.342,62.5
Construction:
  circle w0.025: c0,10 r2.2
  circle w0.025: c0,10 r1.515
  circle w0.025: c-10,10 r1.515
  circle w0.025: c-10,10 r2.2
  circle w0.025: c-10,60 r1.515
  circle w0.025: c-10,60 r2.2
  circle w0.025: c0,60 r1.515
  circle w0.025: c0,60 r2.2
  pour cut-out: 0,8.485 ccw(c0,10) 1.515,10 ccw(c0,10) 0,11.515 ccw(c0,10) -1.515,10 ccw(c0,10)
  pour cut-out: -10,8.485 ccw(c-10,10) -8.485,10 ccw(c-10,10) -10,11.515 ccw(c-10,10) -11.515,10 ccw(c-10,10)
  pour cut-out: -10,58.485 ccw(c-10,60) -8.485,60 ccw(c-10,60) -10,61.515 ccw(c-10,60) -11.515,60 ccw(c-10,60)
  pour cut-out: 0,58.485 ccw(c0,60) 1.515,60 ccw(c0,60) 0,61.515 ccw(c0,60) -1.515,60 ccw(c0,60)

## Text inside footprints (layer, text, board x,y; h text height)
J1: Mechanical 9 "Jacdac / cable connector  / body" at -18.158,45.179 h1.7 r90
J2: Mechanical 9 "Jacdac / cable connector  / body" at 8.158,54.821 h1.7 r270